# Altium PCB SmartCantonDevBox.PcbDoc (part 2 of 2)
Units mm, origin at the board's own origin, x right, y up, seen from the top; angles counter-clockwise.
Board outline 68 x 80 mm, 4 copper layers (Component Side, Ground Plane, Power Plane, Solder Side), stack 1.569 mm thick; 161 components, 90 nets, 543 pads, 213 vias.
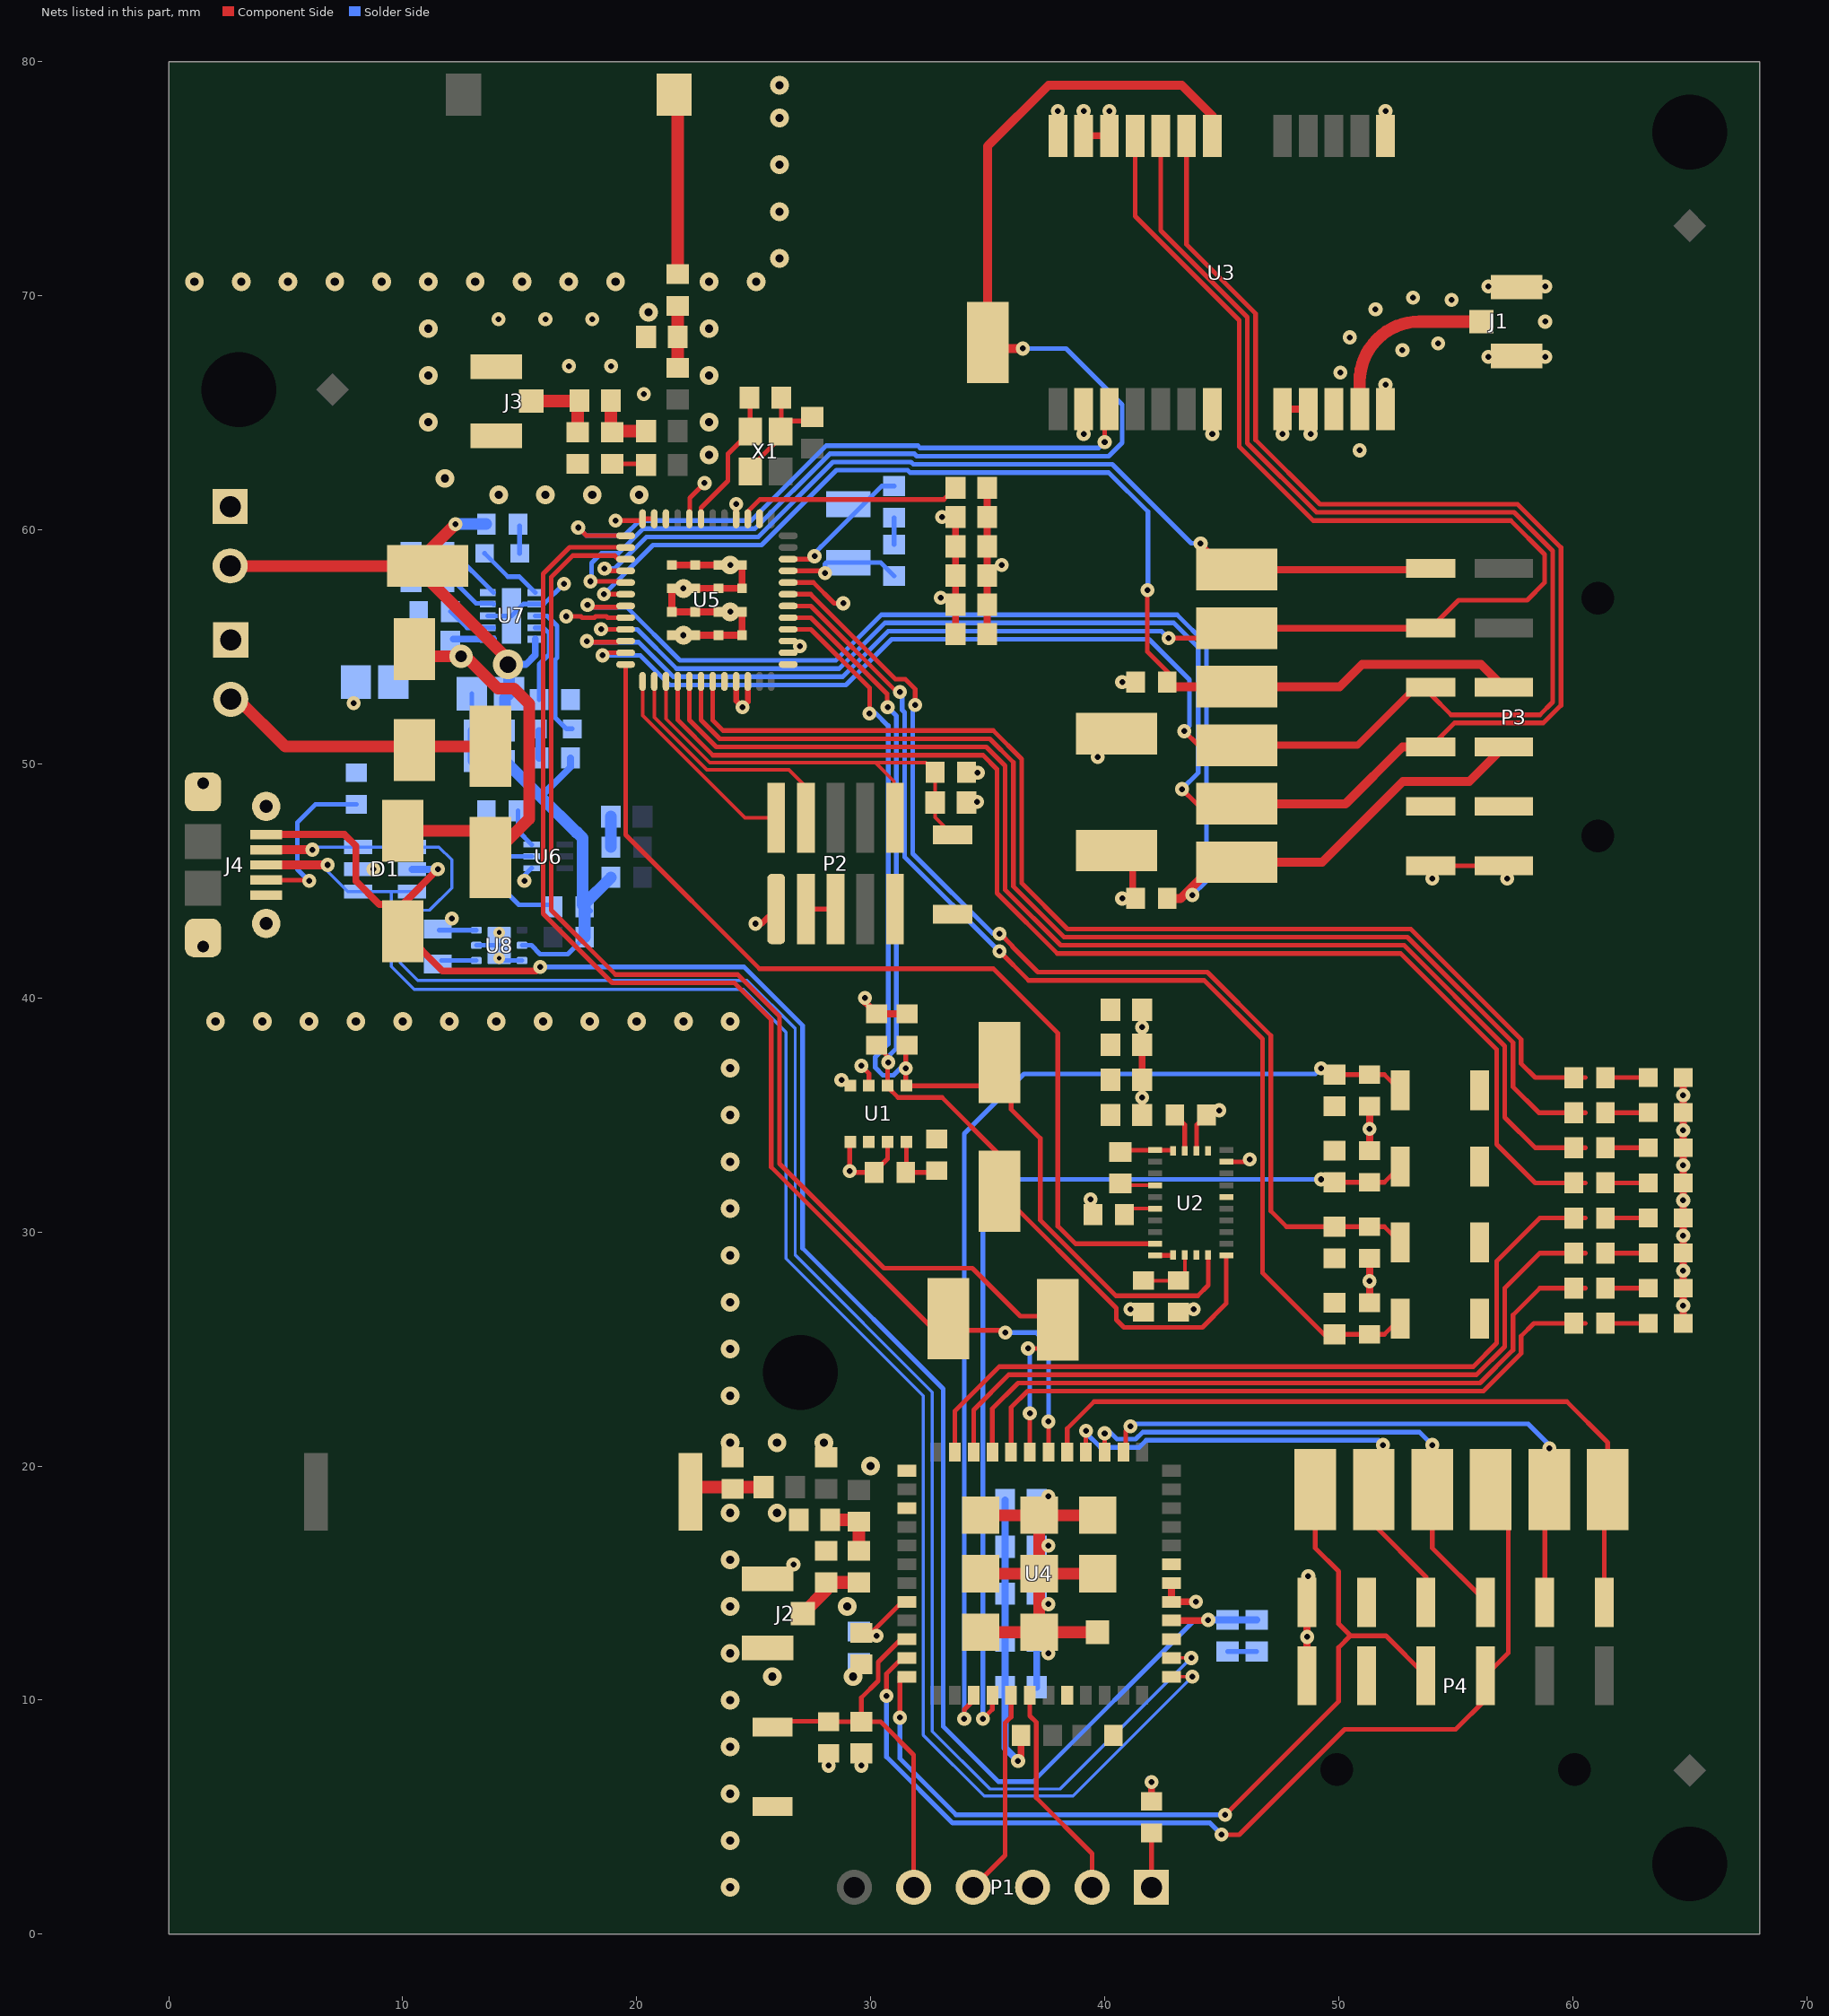
[diagram p4: the nets of this part, all layers, seen from the top]

## Via types
v1: diameter 0.6, hole 0.25, Component Side to Solder Side, tented both sides, 138 vias
v2: diameter 0.8, hole 0.35, Component Side to Solder Side, tented both sides, 67 vias
v3: diameter 0.8, hole 0.25, Component Side to Solder Side, tented both sides, 4 vias
v4: diameter 0.5, hole 0.2, Component Side to Solder Side, 2 vias
v5: diameter 1.27, hole 0.711, Component Side to Solder Side, tented both sides, 1 vias
v6: diameter 1, hole 0.5, Component Side to Solder Side, tented both sides, 1 vias

## Nets (pads, with @x,y where several pads share a name; then routed paths per layer and width w, separated by ;. In a path a pad name is that pad's centre, name@x,y a point inside that pad or via, vN(x,y) a via of type N, cw(c..) or ccw(c..) an arc to the next point about the centre after c; other vN are vias at no path point) (continued)
GND: B1.1 B2.1 B3.1 B4.1 B5.1 B6.1 C1.1 C2.1 C3.2 C4.2 C5.2 C6.2 C7.2 C8.1 C9.1 C10.1 C11.1 C12.1 C13.1 C14.1 C15.1 C16.1 C17.1 C18.1 C19.1 C20.1 C21.1 C24.1 C25.1 C26.1 C27.1 C28.1 C29.1 C30.1 C31.1 C32.1 C33.1 C34.1 C35.1 C36.1 C39.1 C40.1 C41.1 C42.1 C43.1 C44.2 C45.2 D1.2 J1.2 J1.3 J2.2 J2.3 J3.2 J3.3 J4.5 J4.S L2.1 L3.1 L5.1 L6.1 P1.3 P2.3 P2.5 P2.9 P3.9 P3.10 P4.9 P4.10 P5.1 P6.1 R5.1 R13.1 R21.2 R28.2 R30.1 R32.1 R36.1 R37.1 R38.1 TP14.1 U1.1 U1.7 U2.2 U2.5 U2.6 U2.15 U2.16 U2.18 U2.25 U3.2 U3.7 U3.10 U3.12 U3.13 U3.24 U4.3 U4.7 U4.25 U4.27 U4.44 U4.49 U4.50 U4.51 U4.52 U4.53 U4.54 U4.55 U4.56 U4.57 U5.8 U5.13 U5.26 U5.34 U5.49 U5.50 U5.51 U5.52 U5.53 U5.54 U5.55 U5.56 U5.57 U5.58 U5.59 U5.60 U5.61 U5.62 U5.63 U5.64 U6.4 U7.3 U7.7 U7.11 U8.2 U8.6 U8.7@14.125,42.25 X1.2 X1.4 | length 73.3
  Component Side w0.2: L5.1@18.95,62.825 20.35,62.825 C35.1@20.4,62.775 ; X1.4@24.85,62.5 24.85,62.654 26.15,63.954 X1.2@26.15,64.2 26.6,64.65 27.325,64.65 C31.1@27.5,64.825 ; X1.2@26.175,64.225 C30.1@26.175,65.65 ; P2.3@27.23,43.8 P2.5@28.5,43.8 ; C3.2@40.75,33.5 U2.6@42.15,33.5 42.9,33.5 U2.5@42.925,33.475 ; U2.15@42.15,29 U2.16@42.9,29
  Component Side w0.3: U5.49@21.5,55.5 U5.53@22.5,55.5 U5.57@23.5,55.5 U5.61@24.5,55.5 U5.62@24.5,56.5 U5.58@23.5,56.5 U5.54@22.5,56.5 U5.50@21.5,56.5 U5.51@21.5,57.5 U5.55@22.5,57.5 U5.59@23.5,57.5 U5.63@24.5,57.5 U5.64@24.5,58.5 U5.60@23.5,58.5 U5.56@22.5,58.5 U5.52@21.5,58.5 ; C29.1@34.975,55.55 C28.1@34.975,56.8 C27.1@34.975,58.05 C26.1@34.975,59.3 C25.1@34.975,60.55 C24.1@34.975,61.8
  Component Side w0.5: U4.51@34.7,12.9 U4.50@37.2,12.9 ; U4.54@34.7,15.4 U4.53@37.2,15.4 ; U4.57@34.7,17.9 U4.56@37.2,17.9 ; U4.49@39.7,12.9 U4.50@37.2,12.9 ; U4.52@39.7,15.4 U4.53@37.2,15.4 ; U4.55@39.7,17.9 U4.56@37.2,17.9 ; U4.50@37.2,12.9 U4.53@37.2,15.4 ; U4.53@37.2,15.4 U4.56@37.2,17.9
  Solder Side w0.2: C44.2@12.95,53 12.95,51.5 C42.1@13.025,51.425 ; U8.2@13.15,42.25 U8.7@14.125,42.25 ; U7.3@13.634,56.325 U7.11@14.65,56.325 15.158,56.833 U7.7@15.666,56.833 16.033,56.833 v1(16.9,57.7) ; v4(14.125,41.7) 14.225,41.6 U8.6@15.1,41.6 ; v1(15.2,45) 15.2,45.235 U6.4@15.515,45.55 ; C33.1@31,59.375 C34.1@31,60.525 ; C14.1@45.25,12.075 C13.1@46.5,12.075
  Solder Side w0.3: C18.1@37.095,10.55 C19.1@37.095,12.55 C17.1@37.095,14.55 C16.1@37.095,16.55 C15.1@37.095,18.55
  Solder Side w0.5: C43.1@13.025,50.125 C42.1@13.025,51.425 ; R32.1@18.9,46.45 C40.1@18.9,47.75
  other v1: 29.6,7.2 37.6,12 37.6,14.1 26.7,15.8 37.6,16.6 37.6,18.7 41.1,26.7 28.75,36.5 8.75,45.5 34.55,48.375 39.7,50.3 35.6,58.5 50.9,63.4 39.1,64.1 44.6,64.1 20.3,65.8 52,66.2 50.075,66.725 17.1,67 18.9,67 56.4,67.4 58.825,67.4 52.725,67.675 54.25,67.975 50.475,68.225 58.825,68.9 14.1,69 16.1,69 18.1,69 51.575,69.425 54.825,69.825 53.175,69.925 56.4,70.4 58.825,70.4 38,77.9 52,77.9
  other v2: 24,2 24,4 24,6 24,8 24,10 25.8,11 29.25,11 24,12 24,14 29,14 24,16 24,18 26,18 30,20 24,21 26,21 28,21 24,23 24,25 24,27 24,29 24,31 24,33 24,35 24,37 2,39 4,39 6,39 8,39 10,39 12,39 14,39 16,39 18,39 20,39 22,39 24,39 14.1,61.5 16.1,61.5 18.1,61.5 20.1,61.5 11.8,62.2 23.1,63.2 11.1,64.6 23.1,64.6 11.1,66.6 23.1,66.6 11.1,68.6 23.1,68.6 20.5,69.3 1.1,70.6 3.1,70.6 5.1,70.6 7.1,70.6 9.1,70.6 11.1,70.6 13.1,70.6 15.1,70.6 17.1,70.6 19.1,70.6 23.1,70.6 25.1,70.6 26.1,71.6 26.1,73.6 26.1,75.6 26.1,77.6 26.1,79
  other v3: 22,55.5 24,56.5 22,57.5 24,58.5
  other v4: 14.125,42.8
GPS_nCS: TP2.1 U3.18 U5.41 | length 56.2
  Component Side w0.2: v1(18.025,57.8) 19.175,57.8 19.225,57.75 U5.41@19.525,57.75
  Component Side w0.381: v1(36.5,67.75) 35.25,67.75 TP2.1@35,68 35,76.4 37.6,79 43.3,79 44.6,77.7 U3.18@44.6,76.842
  Solder Side w0.2: v1(18.025,57.8) 18.076,57.851 18.076,58.581 18.495,59 19.223,59 20.273,60.05 25.045,60.05 28.245,63.25 31.868,63.25 31.968,63.15 40.178,63.15 40.75,63.722 40.75,65.35 38.35,67.75 v1(36.5,67.75)
I2C0_SCL: R24.1 TP9.1 U1.4 U2.19 U5.16 | length 45.7
  Component Side w0.2: U5.16@26.475,55.75 27.45,55.75 29.951,53.249 v1(29.951,52.153) ; R24.1@31.525,37.95 31.5,37.925 v1(31.5,37) 31.5,36.275 U1.4@31.525,36.25 35.85,36.25 36,36.4 36,35.25 37.25,34 37.25,30.5 40.475,27.275 43.975,27.275 44.425,27.725 U2.19@44.425,29.025
  Solder Side w0.2: v1(29.951,52.153) 30.22,52.153 30.722,51.65 30.75,51.65 30.75,38.028 30.2,37.478 30.2,37.022 30.522,36.7 30.978,36.7 31.278,37 v1(31.5,37)
I2C0_SDA: R23.1 TP8.1 U1.3 U2.20 U5.17 | length 44.5
  Component Side w0.2: U5.17@26.475,56.25 27.445,56.25 30.7,52.995 30.7,52.45 v1(30.725,52.425) ; R23.1@30.25,37.975 30.75,37.475 v1(30.75,37.25) ; v1@30.725,36.975 U1.3@30.725,36.25 30.725,36.196 31.171,35.75 33.05,35.75 TP8.1@35.5,33.3 ; TP8.1@35.2,31.821 35.429,31.821 40.5,26.75 40.5,26.25 40.825,25.925 44.175,25.925 45.2,26.95 U2.20@45.2,29
  Solder Side w0.2: v1(30.725,52.425) 31.1,52.05 31.1,37.855 30.75,37.505 v1(30.75,37.25)
I2C1_SCL: P3.6 R26.1 TP11.1 U5.42 | length 49.6
  Component Side w0.2: v1(18.6,57.25) U5.42@19.525,57.25 ; v1(41.825,57.425) 41.825,54.8 R26.1@42.9,53.725
  Component Side w0.381: R26.1@42.875,53.3 TP11.1@45.65,53.3 50.05,53.3 51,54.25 56.08,54.25 P3.6@57.06,53.27
  Solder Side w0.2: v1(18.6,57.25) 20.7,59.35 25.335,59.35 28.535,62.55 31.579,62.55 31.679,62.45 40.178,62.45 41.85,60.778 v1@41.85,57.45
I2C1_SDA: P3.8 R25.1 TP10.1 U5.43 | length 59
  Component Side w0.2: v1(17.9,56.8) 18,56.7 19.15,56.7 19.2,56.75 U5.43@19.525,56.75 ; 43.25,44.25 43.4,44.4 v1(43.75,44.4)
  Component Side w0.381: R25.1@42.675,44.25 43.25,44.25 44.8,45.8 TP10.1@45.65,45.8 49.3,45.8 52.75,49.25 55.58,49.25 P3.8@57.06,50.73
  Solder Side w0.2: v1(17.9,56.8) 18,56.7 19.575,56.7 21.85,54.425 28.51,54.425 30.025,55.94 30.46,56.375 43.095,56.375 44.35,55.12 44.35,45 v1(43.75,44.4)
INT_BNO055: U2.14 U5.48 | length 42
  Component Side w0.2: U5.48@19.525,54.25 19.525,46.975 25.25,41.25 35.25,41.25 38,38.5 38,30.25 38.75,29.5 U2.14@42.15,29.5
KW41Z_PMOD_MISO: P3.5 TP4.1 U3.20 U5.47 | length 84.4
  Component Side w0.2: v1(18.538,54.64) 18.648,54.75 U5.47@19.525,54.75 ; U3.20@42.4,76.842 42.4,72.795 46.1,69.095 46.1,63.705 49.055,60.75 57.5,60.75 59.15,59.1 59.15,52.65 58.6,52.1 54.805,52.1 53.93,52.975 P3.5@53.93,53.27 ; v1(43.4,51.4) 44,50.8 TP4.1@45.65,50.8
  Component Side w0.3: TP4.1@45.65,50.8 50.8,50.8 53.27,53.27 P3.5@53.93,53.27
  Solder Side w0.2: v1(18.538,54.64) 20.15,54.64 21.415,53.375 28.945,53.375 30.895,55.325 41.9,55.325 43.625,53.6 43.625,51.625 v1(43.4,51.4)
KW41Z_PMOD_MOSI: P3.3 TP5.1 U3.21 U5.46 | length 76.4
  Component Side w0.2: v1(17.875,55.25) 17.925,55.2 19.175,55.2 19.225,55.25 U5.46@19.525,55.25 ; U3.21@41.3,76.842 41.3,73.4 45.75,68.95 45.75,63.56 48.91,60.4 57.355,60.4 58.8,58.955 58.8,57.75 58.05,57 55.12,57 P3.3@53.93,55.81 ; v1(42.725,55.375) 45.225,55.375 TP5.1@45.65,55.8
  Component Side w0.3: TP5.1@45.65,55.8 P3.3@53.92,55.8
  Solder Side w0.2: v1(17.875,55.25) 17.922,55.203 20.082,55.203 21.56,53.725 28.8,53.725 30.75,55.675 42.425,55.675 v1(42.725,55.375)
KW41Z_PMOD_SCK: P3.7 TP3.1 U3.19 U5.45 | length 89
  Component Side w0.2: v1(18.476,55.753) 19.522,55.753 U5.45@19.525,55.75 ; v1(43.3,48.925) 43.925,48.3 TP3.1@45.65,48.3 ; U3.19@43.5,76.842 43.5,72.19 46.45,69.24 46.45,63.85 49.2,61.1 57.645,61.1 59.5,59.245 59.5,52.5 58.75,51.75 54.95,51.75 P3.7@53.93,50.73
  Component Side w0.381: TP3.1@45.65,48.3 50.3,48.3 52.73,50.73 P3.7@53.93,50.73
  Solder Side w0.2: v1(18.476,55.753) 20.027,55.753 21.705,54.075 28.655,54.075 30.375,55.795 30.605,56.025 42.95,56.025 44,54.975 44,49.625 v1(43.3,48.925)
KW41Z_PMOD_SSEL: P3.1 TP1.1 U5.40 | length 39.6
  Component Side w0.2: v1(18.626,58.353) 18.729,58.25 U5.40@19.525,58.25 ; v1(44.1,59.425) TP1.1@45.225,58.3
  Component Side w0.3: TP1.1@45.65,58.3 P3.1@53.88,58.3
  Solder Side w0.2: v1(18.626,58.353) 19.071,58.353 20.418,59.7 25.19,59.7 28.39,62.9 31.724,62.9 31.824,62.8 40.323,62.8 43.698,59.425 v1(44.1,59.425)
LoRa_PMOD_MISO: P4.5 TP21.1 U4.15 | length 22.9
  Component Side w0.2: U4.15@40,20.6 v1(40,21.4) ; v1(54,20.9) TP21.1@54,19 54,16.5 56.27,14.23 P4.5@56.27,14.17
  Solder Side w0.2: v1(40,21.4) v1@40.178,21.4 ; v1@40.228,21.45 40.528,21.15 41.328,21.15 41.628,21.45 53.45,21.45 v1(54,20.9)
LoRa_PMOD_MOSI: P4.3 TP22.1 U4.14 | length 26.9
  Component Side w0.2: U4.14@40.8,20.6 40.7,20.7 40.9,20.9 40.9,21.5 v1(41.1,21.7) ; P4.3@58.81,14.17 58.81,18.81 TP22.1@59,19 59,20.9 v1(59,20.75)
  Solder Side w0.2: v1(41.1,21.7) 41,21.8 58.1,21.8 59,20.9 v1(59,20.75)
LoRa_PMOD_SCK: P4.7 TP19.1 U4.16 | length 19.9
  Component Side w0.2: U4.16@39.2,20.6 v1(39.2,21.5) ; TP19.1@51.5,19 51.5,17.5 53.73,15.27 P4.7@53.73,14.17
  Solder Side w0.2: v1(39.2,21.5) 39.2,21.422 39.822,20.8 40.378,20.8 41.473,20.8 41.773,21.1 51.7,21.1 v1(51.9,20.9)
LoRa_PMOD_SCL: P4.6 TP20.1 U4.35 | length 43.8
  Component Side w0.2: v1(30.675,10.175) 30.675,11.129 31.346,11.8 U4.35@31.55,11.8 ; v1(45,4.25) 45.75,4.25 50.25,8.75 55,8.75 56.27,10.02 P4.6@56.27,11.04 57.25,12.02 57.25,18.25 TP20.1@56.5,19
  Solder Side w0.2: v1(30.675,10.175) 30.675,7.575 33.5,4.75 44.5,4.75 v1(45,4.25)
LoRa_PMOD_SDA: P4.8 TP18.1 U4.36 | length 39.4
  Component Side w0.2: v1(31.25,9.25) 31.25,11 U4.36@31.55,11 ; v1(45.15,5.1) 50,9.95 50,12.25 50.5,12.75 ; TP18.1@49,19 49,16.5 50,15.5 50,13.25 50.5,12.75 ; P4.8@53.73,11.04 52.02,12.75 50.5,12.75
  Solder Side w0.2: v1(31.25,9.25) 31.25,7.5 33.65,5.1 v1(45.15,5.1)
LoRa_PMOD_SSEL: P4.1 TP17.1 U4.17 | length 32.2
  Component Side w0.2: U4.17@38.4,20.6 38.4,21.6 39.55,22.75 59.75,22.75 61.5,21 TP17.1@61.5,19 61.35,18.85 P4.1@61.35,14.17
MCU_nRST: B5.2 C10.2 P1.5 R22.2 U4.34 | length 16.7
  Component Side w0.2: B5.2@25.8,9.1 R22.2@28.175,9.1 ; R22.2@28.2,9.075 C10.2@29.6,9.075 ; U4.34@31.55,12.6 31.3,12.6 30.325,11.625 30.325,10.825 29.6,10.1 C10.2@29.6,9.075 ; P1.5@31.84,2 31.84,7.66 30.425,9.075 C10.2@29.6,9.075
NetC3_1: C3.1 U2.9 | length 1.4
  Component Side w0.15: C3.1@40.75,32 U2.9@42.15,32
NetC21_2: C21.2 E1.1 L1.2 | length 3.2
  Component Side w0.53: E1.1@22.301,18.9 22.501,19.1 L1.2@25.425,19.1
NetC22_2: C22.2 C23.1 L2.2 | length 2.5
  Component Side w0.548: L2.2@28.275,17.7 29.425,17.7 C22.2@29.5,17.625 C23.1@29.5,16.375
NetC23_2: C23.2 J2.1 L3.2 | length 3.1
  Component Side w0.548: J2.1@27.1,13.7 28.1,14.7 L3.2@28.1,15.025 C23.2@29.5,15.025
NetC36_2: C36.2 C46.1 L4.2 | length 2.6
  Component Side w0.53: L4.2@21.75,66.925 C36.2@21.75,68.25 C46.1@21.75,69.575
NetC37_2: C37.2 C38.1 L5.2 | length 2.8
  Component Side w0.53: L5.2@18.9,64.225 C38.1@18.9,65.525 ; L5.2@18.95,64.175 19,64.225 C37.2@20.4,64.225
NetC38_2: C38.2 J3.1 L6.2 | length 3.4
  Component Side w0.53: J3.1@15.5,65.5 17.525,65.5 17.475,65.45 L6.2@17.475,64.175
NetC39_2: C39.2 R29.1 U6.5 | length 5.5
  Solder Side w0.2: U6.5@15.515,46.05 14.55,46.05 13.861,45.361 C39.2@13.584,45.361 14.961,43.984 R29.1@16.341,43.984
NetC41_2: C41.2 D2.K D3.K TP15.1 U7.1 | length 19.9
  Component Side w0.5: D3.K@10,47.15 13.75,47.15 TP15.1@13.75,46 15.4,47.65 15.4,52.575 14.76,53.215 14.071,53.215 12.677,54.609 v6@12.5,54.609 ; D2.K@10.5,54.9 11,54.4 11.2,54.6 v6(12.5,54.6) v6@12.5,54.609
  Solder Side w0.3: C41.2@12.157,55.334 U7.1@13.884,55.334
NetC46_2: C46.2 E2.1 | length 7.7
  Component Side w0.53: E2.1@21.6,78.6 21.75,78.45 C46.2@21.75,70.925
NetDS1_2: DS1.2 R1.2 | length 1.8
  Component Side w0.2: R1.2@61.4,36.6 DS1.2@63.225,36.6
NetDS2_2: DS2.2 R3.2 | length 1.8
  Component Side w0.2: R3.2@61.4,35.1 DS2.2@63.225,35.1
NetDS3_2: DS3.2 R4.2 | length 1.8
  Component Side w0.2: R4.2@61.4,33.6 DS3.2@63.225,33.6
NetDS4_2: DS4.2 R6.2 | length 1.8
  Component Side w0.2: R6.2@61.4,32.1 DS4.2@63.225,32.1
NetDS5_2: DS5.2 R7.2 | length 1.8
  Component Side w0.2: R7.2@61.4,30.6 DS5.2@63.225,30.6
NetDS6_2: DS6.2 R8.2 | length 1.8
  Component Side w0.2: R8.2@61.4,29.1 DS6.2@63.225,29.1
NetDS7_2: DS7.2 R9.2 | length 1.8
  Component Side w0.2: R9.2@61.4,27.6 DS7.2@63.225,27.6
NetDS8_2: DS8.2 R10.2 | length 1.8
  Component Side w0.2: R10.2@61.4,26.1 DS8.2@63.225,26.1
NetDS9_1: DS9.1 R33.2 | length 1.2
  Solder Side w0.3: R33.2@15.825,50.25 DS9.1@15.825,51.425
NetDS9_2: DS9.2 U7.8 | length 6
  Solder Side w0.2: U7.8@15.666,56.325 16.175,56.325 16.6,55.9 16.6,54.53 16.525,54.455 16.525,51.975 17,51.5 DS9.2@17.25,51.5
NetDS10_1: DS10.1 R34.2 | length 1.2
  Solder Side w0.2: DS10.1@15,59 R34.2@15,60.175
NetDS10_2: DS10.2 U7.6 | length 2.9
  Solder Side w0.2: DS10.2@13.5,59 14.5,58 14.982,58 U7.6@15.666,57.316
NetJ4_4: J4.4 R28.1 | length 7.4
  Component Side w0.2: J4.4@4.166,45.036 5.964,45.036 v1(6,45)
  Solder Side w0.2: v1(6,45) 5.5,45.5 5.5,47.5 6.275,48.275 R28.1@8.025,48.275
NetL7_1: L7.1 U8.1 | length 1.5
  Solder Side w0.2: L7.1@11.65,41.6 U8.1@13.15,41.6
NetP1_1: P1.1 R19.2 | length 2.3
  Component Side w0.2: P1.1@42,2 R19.2@42,4.325
NetR2_1: R2.1 R5.2 U1.5 | length 2.6
  Component Side w0.2: R2.1@31.5,32.55 32.75,32.55 R5.2@32.825,32.625 ; R2.1@31.525,32.575 U1.5@31.525,33.85
NetR11_1: R11.1 R13.2 U2.17 | length 2.7
  Component Side w0.15: R13.2@41.65,27.925 R11.1@43.15,27.925 R11.1@43.325,28.1 ; R11.1@43.425,28.1 U2.17@43.425,29.025
NetR12_2: R12.2 U2.11 | length 1
  Component Side w0.15: R12.2@41.1,31 U2.11@42.15,31
NetR18_2: R18.2 U2.4 | length 1.7
  Component Side w0.2: R18.2@43,35 43.425,34.575 U2.4@43.425,33.475
NetR30_2: R30.2 U6.6 | length 1.7
  Solder Side w0.2: R30.2@14.925,48 14.925,47.14 U6.6@15.515,46.55
NetR35_1: R35.1 R36.2 U7.5 | length 4.3
  Solder Side w0.2: R36.2@10.359,59.086 R35.1@11.759,59.086 12.114,59.086 U7.5@13.884,57.316
NetR35_2: R35.2 U7.4 | length 2.5
  Solder Side w0.2: R35.2@11.759,57.736 12.264,57.736 13.137,56.863 13.854,56.863 U7.4@13.884,56.833
NetR37_2: R37.2 U7.9 | length 3.7
  Solder Side w0.2: U7.9@15.666,55.817 16.02,55.817 16.25,55.587 16.25,54.675 15.825,54.25 R37.2@15.825,52.75
NetR38_2: R38.2 U7.2 | length 2.1
  Solder Side w0.2: R38.2@12.034,56.511 12.058,56.511 12.752,55.817 U7.2@13.884,55.817
PTA0_SWD_DIO: P2.2 U5.1 | length 9
  Component Side w0.15: U5.1@20.25,53.525 20.25,52.076 24.626,47.7 P2.2@25.96,47.7
PTA1_SWD_CLK: P2.4 U5.2 | length 10.6
  Component Side w0.15: U5.2@20.75,53.525 20.75,52 23,49.75 26.5,49.75 27.23,49.02 P2.4@27.23,47.7
PTA2/nRESET: B6.2 C32.2 P2.10 R27.2 U5.3 | length 19
  Component Side w0.15: U5.3@21.25,53.525 21.25,51.924 23.124,50.05 30.2,50.05 ; P2.10@31,48.365 31,49.25 30.2,50.05 ; B6.2@33.5,46.975 32.75,47.725 R27.2@32.75,49.65 32.35,50.05 30.2,50.05
PTB16/EXTAL_32K: C33.2 U5.21 X2.1 | length 5.2
  Component Side w0.2: U5.21@26.475,58.25 27.954,58.25 v1(28.051,58.153)
  Solder Side w0.2: v1(28.051,58.153) 28.051,58.549 28.103,58.6 X2.1@29.05,58.6 30.425,58.6 C33.2@31,58.025
PTB17/XTAL_32K: C34.2 U5.22 X2.2 | length 6.1
  Component Side w0.2: U5.22@26.475,58.75 27.475,58.75 v1(27.6,58.875)
  Solder Side w0.2: v1(27.6,58.875) 27.486,58.875 27.48,58.88 27.85,59.25 27.85,59.254 27.996,59.4 28,59.4 30.475,61.875 C34.2@31,61.875
RF_IN: J1.1 U3.11 | length 7.8
  Component Side w0.53: U3.11@50.9,65.158 50.9,66.348 cw(c53.44,66.348) 51.644,68.144 51.656,68.156 cw(c53.452,66.36) 53.452,68.9 J1.1@56.1,68.9
SOLAR_INPUT: D2.A P5.2 TP12.1 | length 11.9
  Component Side w0.5: P5.2@2.65,52.76 2.965,52.76 4.975,50.75 TP12.1@13.75,50.75
SWCLK: P1.2 U4.42 | length 9.3
  Component Side w0.2: U4.42@36.8,10.2 36.8,9.329 37.075,9.054 37.075,5.825 39.46,3.44 P1.2@39.46,2
SWDIO: P1.4 U4.41 | length 8.9
  Component Side w0.2: P1.4@34.38,2 35.75,3.37 35.75,9.029 36,9.279 U4.41@36,10.2
TIMEPULSE: U3.3 U5.37 | length 28
  Component Side w0.2: v1(17.5,60.1) 17.85,59.75 U5.37@19.525,59.75 ; v1(40,63.75) 40,64.958 U3.3@40.2,65.158
  Solder Side w0.2: v1(17.5,60.1) 17.85,59.75 19.478,59.75 20.128,60.4 24.9,60.4 28.1,63.6 32.013,63.6 32.113,63.5 39.75,63.5 v1(40,63.75)
UART0_RX: TP7.1 U4.18 U5.38 | length 56.7
  Component Side w0.2: U5.38@19.525,59.25 19.522,59.253 17.128,59.253 16,58.125 16,43.6 18.95,40.65 24.175,40.65 25.75,39.075 25.75,32.775 32.825,25.7 33.325,25.7 TP7.1@33.325,26.3 ; TP7.1@33.475,25.8 35.85,25.8 v1(35.75,25.7) ; U4.18@37.6,20.6 v1(37.6,21.9)
  Solder Side w0.2: v1(35.75,25.7) 37.075,25.7 37.6,25.175 v1(37.6,21.9)
UART0_TX: TP6.1 U4.19 U5.39 | length 56.4
  Component Side w0.2: U5.39@19.525,58.75 19.208,58.75 19.056,58.903 17.273,58.903 16.35,57.98 16.35,43.745 19.095,41 24.32,41 26.1,39.22 26.1,32.92 30.57,28.45 34.35,28.45 36.4,26.4 TP6.1@37.85,26.4 ; v1(36.725,25.025) 37.2,25.025 37.775,25.6 TP6.1@37.55,25.825 ; U4.19@36.8,20.6 v1(36.8,22.25)
  Solder Side w0.2: v1(36.725,25.025) 36.8,25.1 v1(36.8,22.25)
USB_5V: C13.2 C14.2 D1.5 D3.A J4.1 U4.4 | length 82.5
  Component Side w0.3: J4.1@4.166,46.986 7.514,46.986 8,46.5 8,45 9,44 D3.A@10,44 ; v1(11.5,45.5) D3.A@10,44 ; v1(15.876,41.327) 15.699,41.15 11.7,41.15 D3.A@10,42.85 D3.A@10,44 ; U4.4@42.85,13.4 44.4,13.4 v1(44.425,13.425)
  Solder Side w0.2: v1(15.876,41.327) 24.591,41.327 27.091,38.827 27.091,29.309 33.1,23.3 33.1,8.875 35.459,6.516 36.941,6.516 43.85,13.425 v1(44.425,13.425)
  Solder Side w0.3: D1.5@10.4,45.5 v1(11.5,45.5) ; v1(44.425,13.425) C14.2@45.25,13.425 C13.2@46.5,13.425
USB_D_N: D1.3 D1.4 J4.2 U4.2 | length 79.7
  Component Side w0.132: U4.2@42.85,11.8 v1(43.7,11.8)
  Component Side w0.381: J4.2@4.166,46.336 v1(6.136,46.336)
  Solder Side w0.132: v1(6.136,46.336) 6.25,46.45 D1.3@8.1,46.45 D1.4@10.4,46.45 11.55,46.45 12.1,45.9 12.1,44.7 11.15,43.75 10.5,43.75 9.9,43.15 9.9,41.5 10.65,40.75 24.721,40.75 26.775,38.696 26.775,29.021 32.636,23.16 32.636,8.66 35.096,6.2 38.1,6.2 v1(43.7,11.8)
USB_D_P: D1.1 D1.6 J4.3 U4.1 | length 77.6
  Component Side w0.132: U4.1@42.85,11 v1(43.75,11)
  Component Side w0.381: J4.3@4.166,45.686 v1(6.786,45.686)
  Solder Side w0.132: v1(6.786,45.686) 6.786,45.414 7.65,44.55 D1.1@8.1,44.55 ; D1.6@10.4,44.55 D1.1@8.1,44.55 ; v1(43.75,11) 38.65,5.9 34.85,5.9 32.25,8.5 32.25,23 26.389,28.861 26.389,38.536 24.561,40.364 10.49,40.364 9.514,41.34 9.514,44.55 D1.1@8.1,44.55
USR_BTN0: B1.2 C4.1 R14.1 U5.18 | length 49.2
  Component Side w0.2: U5.18@26.475,56.75 27.44,56.75 31.115,53.075 v1(31.25,53.075) ; v1(35.5,42) 36.75,40.75 44.25,40.75 46.75,38.25 46.75,28.25 49.375,25.625 C4.1@49.825,25.625 R14.1@51.325,25.625 51.95,25.625 B1.2@52.625,26.3
  Solder Side w0.2: v1(31.25,53.075) 31.35,52.975 31.35,52.297 31.45,52.197 31.45,46.022 35.472,42 v1(35.5,42)
USR_BTN1: B2.2 C5.1 R15.1 U5.19 | length 46.2
  Component Side w0.2: U5.19@26.475,57.25 27.435,57.25 31.06,53.625 31.478,53.625 31.9,53.203 v1(31.9,52.525) ; v1(35.5,42.75) 35.528,42.75 36.05,42.228 36.05,42.2 37.15,41.1 44.395,41.1 47.1,38.395 47.1,30.9 47.775,30.225 C5.1@49.825,30.225 R15.1@51.325,30.225 51.95,30.225 B2.2@52.625,29.55
  Solder Side w0.2: v1@31.8,52.425 31.8,46.167 35.217,42.75 v1(35.5,42.75)
USR_BTN2: B3.2 C6.1 R16.1 U4.40 | length 42.1
  Component Side w0.2: v1(34.8,9.2) 35.2,9.6 U4.40@35.2,10.2 ; v1(49.25,32.25) 49.125,32.125 C6.1@49.825,32.125 R16.1@51.325,32.125 51.95,32.125 B3.2@52.625,32.8
  Solder Side w0.2: v1(34.8,9.2) 34.8,31.3 35.75,32.25 v1(49.25,32.25)
USR_BTN3: B4.2 C7.1 R17.1 U4.39 | length 46.4
  Component Side w0.2: v1(34,9.2) 34,9.596 34.4,9.996 U4.39@34.4,10.2 ; v1(49.25,37) 49.5,37 49.8,36.7 C7.1@49.825,36.725 R17.1@51.325,36.725 51.95,36.725 B4.2@52.625,36.05
  Solder Side w0.2: v1(34,9.2) 34,34.2 36.55,36.75 49,36.75 v1(49.25,37)
USR_LED0: R1.1 U5.7 | length 49
  Component Side w0.2: U5.7@23.25,53.525 23.25,51.869 23.694,51.425 35.235,51.425 36.45,50.21 36.45,44.91 38.41,42.95 53.085,42.95 57.8,38.235 57.8,37.2 58.4,36.6 60.55,36.6
USR_LED1: R3.1 U5.6 | length 50.6
  Component Side w0.2: U5.6@22.75,53.525 22.75,51.874 23.549,51.075 35.09,51.075 36.1,50.065 36.1,44.765 38.265,42.6 52.94,42.6 57.45,38.09 57.45,36.204 58.554,35.1 60.55,35.1
USR_LED2: R4.1 U5.5 | length 52.4
  Component Side w0.2: U5.5@22.25,53.525 22.25,51.879 23.404,50.725 34.945,50.725 35.75,49.92 35.75,44.62 38.12,42.25 52.795,42.25 57.1,37.945 57.1,34.9 58.4,33.6 60.55,33.6
USR_LED3: R6.1 U5.4 | length 54.1
  Component Side w0.2: U5.4@21.75,53.525 21.75,51.884 23.259,50.375 34.8,50.375 35.4,49.775 35.4,44.475 37.975,41.9 52.65,41.9 56.75,37.8 56.75,33.75 58.4,32.1 60.55,32.1
USR_LED4: R7.1 U4.23 | length 34.2
  Component Side w0.2: U4.23@33.6,20.6 33.6,22.35 35.5,24.25 55.75,24.25 56.75,25.25 56.75,28.75 58.6,30.6 60.55,30.6
USR_LED5: R8.1 U4.22 | length 32.2
  Component Side w0.2: U4.22@34.4,20.6 34.4,22.4 35.9,23.9 55.895,23.9 57.1,25.105 57.1,27.6 58.6,29.1 60.55,29.1
USR_LED6: R9.1 U4.21 | length 30.2
  Component Side w0.2: U4.21@35.2,20.6 35.2,22.45 36.3,23.55 56.04,23.55 57.45,24.96 57.45,26.45 58.6,27.6 60.55,27.6
USR_LED7: R10.1 U4.20 | length 28.4
  Component Side w0.2: U4.20@36,20.6 36,22.5 36.7,23.2 56.185,23.2 57.8,24.815 57.8,25.55 58.35,26.1 60.55,26.1
VBAT: C42.2 C43.2 C44.1 P6.2 R29.2 R31.2 R33.1 R34.1 R39.2 TP13.1 U7.10 U8.5 | length 40.1
  Component Side w0.5: P6.2@2.625,58.46 TP13.1@11.065,58.46 ; v1(12.25,60.25) 11.065,59.065 11.065,57.91 14.5,54.475 v5(14.5,54.25)
  Solder Side w0.2: U8.5@15.1,42.25 15.501,42.25 15.874,41.877 17.052,41.877 R39.2@17.775,42.6 ; R29.2@17.9,43.85 R29.2@18.025,43.725
  Solder Side w0.3: v5(14.5,54.25) 15.259,54.25 15.666,54.657 U7.10@15.666,55.334 ; 15.9,48.6 17.175,49.875 R33.1@17.175,50.25
  Solder Side w0.5: v1(12.25,60.25) R34.1@13.575,60.25 ; v5(14.5,54.25) 14.55,54.2 C44.1@14.55,53 14.375,52.825 C42.2@14.375,51.425 C43.2@14.375,50.125 15.9,48.6 17.425,47.075 17.451,47.075 17.685,46.841 17.685,43.99 R29.2@17.775,43.9 ; R39.2@17.775,42.6 R29.2@17.775,43.9 ; R31.2@18.9,45.15 17.775,44.025 R29.2@17.775,43.9
VCC_3.3: C1.2 C2.2 C8.2 C9.2 C15.2 C16.2 C17.2 C18.2 C19.2 C25.2 C26.2 C27.2 C28.2 C29.2 C45.1 DS1.1 DS2.1 DS3.1 DS4.1 DS5.1 DS6.1 DS7.1 DS8.1 L7.2 P2.1 P3.11 P3.12 P4.11 P4.12 R2.2 R11.2 R12.1 R14.2 R15.2 R16.2 R17.2 R18.1 R19.1 R20.2 R22.1 R23.2 R24.2 R25.2 R26.2 R27.1 TP16.1 U1.2 U1.6 U1.8 U2.3 U2.28 U3.8 U3.9 U3.22 U3.23 U4.5 U4.6 U5.9 U5.10 U5.14 U5.15 U5.20 U5.28 U5.32 U5.35 U5.36 U5.44 U8.3 | length 76.6
  Component Side w0.2: v1(16.995,56.305) 17.601,56.305 17.599,56.303 17.619,56.303 17.672,56.25 18.128,56.25 18.195,56.25 18.248,56.303 18.704,56.303 18.756,56.25 U5.44@19.525,56.25 ; v1(19.1,60.4) 20.175,60.4 U5.36@20.25,60.475 U5.35@20.75,60.475 ; U5.32@22.25,60.475 22.265,60.49 22.265,61.365 v1(22.9,62) ; U5.20@26.475,57.75 27.55,57.75 28.437,56.863 v1(28.827,56.863) ; U1.8@29.125,33.85 29.1,33.825 v1(29.1,32.6) 29.15,32.55 R2.2@30.15,32.55 30.725,33.125 U1.6@30.725,33.85 ; v1(29.6,37.1) 29.925,36.775 U1.2@29.925,36.25 ; v1(39.4,31.4) 39.4,30.85 R12.1@39.5,30.75 ; U2.3@43.925,33.475 43.925,34.575 R18.1@44.35,35 ; U2.28@45.2,33 v1@46.1,33 ; P3.11@53.93,45.65 P3.12@57.06,45.65
  Component Side w0.25: U5.9@24.25,53.525 24.25,52.7 v1(24.525,52.425) 24.75,52.65 U5.10@24.75,53.525 ; U5.28@24.25,60.475 v1(24.25,61.1) ; v1(25.076,43.176) 25.336,43.176 P2.1@25.96,43.8
  Component Side w0.3: v1(29.75,40) 29.75,39.825 R23.2@30.25,39.325 R24.2@31.55,39.325 ; v1(33,57.1) 33.325,57.1 C28.2@33.625,56.8 ; v1(33.05,60.55) C25.2@33.625,60.55 C26.2@33.625,59.3 C27.2@33.625,58.05 C28.2@33.625,56.8 ; C29.2@33.625,55.55 C28.2@33.625,56.8 ; v1(36.3,7.4) 36.425,7.525 R20.2@36.425,8.5 ; U3.23@39.1,76.842 U3.22@40.2,76.842 ; TP16.1@40.5,46.3 41.2,45.6 41.2,44.25 v1(40.75,44.25) ; C9.2@41.6,35 C8.2@41.6,36.5 C2.2@41.6,38 C1.2@41.6,39.5 ; R19.1@42,5.675 v1(42,6.5) ; U4.6@42.85,15 U4.5@42.85,14.2 v1(43.9,14.2) ; U3.8@47.6,65.158 U3.9@48.7,65.158 ; P4.12@48.65,11.04 P4.11@48.65,14.17 ; R14.2@51.325,26.975 R15.2@51.325,28.875 ; R16.2@51.325,33.475 R17.2@51.325,35.375 ; DS8.1@64.725,26.1 DS7.1@64.725,27.6 DS6.1@64.725,29.1 DS5.1@64.725,30.6 DS4.1@64.725,32.1 DS3.1@64.725,33.6 DS2.1@64.725,35.1 DS1.1@64.725,36.6
  Solder Side w0.2: L7.2@11.55,42.9 U8.3@13.15,42.9
  Solder Side w0.3: C15.2@35.745,18.55 C16.2@35.745,16.55 C17.2@35.745,14.55 C19.2@35.745,12.55 C18.2@35.745,10.55 35.745,7.955 v1(36.3,7.4) ; v1@41.9,6.6 v1(42,6.5)
  other v1: 28.2,7.2 48.65,12.7 48.7,15.3 43.8,26.7 64.725,26.85 51.325,27.9 64.725,28.35 64.725,29.85 64.725,31.35 64.725,32.85 46.2,33.1 64.725,34.35 51.325,34.4 44.9,35.2 41.6,35.75 64.725,35.85 41.6,38.75 12.1,43.4 54,45.1 57.2,45.1 34.575,49.625 7.9,52.6 40.75,53.5 26.975,55.025 47.6,64.1 48.8,64.1 39.1,77.9 40.2,77.9
VREF: C24.2 U5.27 | length 9.6
  Component Side w0.2: U5.27@24.75,60.475 24.75,60.792 25.258,61.3 33.125,61.3 C24.2@33.625,61.8
VREF+: C11.2 C12.2 U4.32 | length 2.5
  Component Side w0.2: C12.2@29.6,12.875 30.021,12.875 31.346,14.2 U4.32@31.55,14.2
  other v1: 30.25,12.75
XTAL: C30.2 U5.31 X1.3 | length 6
  Component Side w0.2: U5.31@22.75,60.475 22.75,60.945 23.9,62.095 23.9,63.2 ; 23.9,63.25 X1.3@24.85,64.2 C30.2@24.85,65.625
pads on no net: E1.2 E2.2 J4. M1.1 M2.1 M3.1 M4.1 M5.1 M6.1 P1.6 P2.6 P2.7 P2.8 P3.0 P3.2 P3.4 P4.0 P4.2 P4.4 U2.1 U2.7 U2.8 U2.10 U2.12 U2.13 U2.21 U2.22 U2.23 U2.24 U2.26 U2.27 U3.1 U3.4 U3.5 U3.6 U3.14 U3.15 U3.16 U3.17 U4.8 U4.9 U4.10 U4.11 U4.12 U4.13 U4.24 U4.28 U4.29 U4.30 U4.31 U4.33 U4.37 U4.38 U4.45 U4.46 U4.47 U4.48 U5.11 U5.12 U5.24 U5.25 U5.29 U6.1 U6.2 U8.7@14.125,41.8 U8.7@14.125,42.7
copper on no net: | length 44
  Component Side w0.1: 56.5,77 56.5,79 ; 58,77 58,79 ; 59.5,77 59.5,79 ; 55,77 55,79 61,79 61,77 55,77
  Solder Side w0.1: 56.5,77 56.5,79 ; 58,77 58,79 ; 59.5,77 59.5,79 ; 55,77 55,79 61,79 61,77 55,77

## Polygon pours and split planes (outlines as drawn)
GND on Component Side "Bottom Layer-No Net" (solid, remove dead copper, pour order 0): 0,80 68,80 68,0 0,0
GND on Solder Side "Bottom Layer-No Net" (solid, remove dead copper, pour order 2): 0,80 68,80 68,0 0,0
GND on Ground Plane (split plane): 59.449,77.051 58.051,77.051 58.051,78.949 59.449,78.949
GND on Ground Plane (split plane): 57.949,77.051 56.551,77.051 56.551,78.949 57.949,78.949
GND on Ground Plane (split plane): 60.949,77.051 59.551,77.051 59.551,78.949 60.949,78.949
GND on Ground Plane (split plane): 56.449,77.051 55.051,77.051 55.051,78.949 56.449,78.949
GND on Ground Plane (split plane): 67.49,0.51 23.5,0.51 23.5,38.5 0.51,38.5 0.51,71.5 25.5,71.5 25.5,79.49 67.49,79.49
VCC_3.3 on Power Plane (split plane): 59.449,77.051 58.051,77.051 58.051,78.949 59.449,78.949
VCC_3.3 on Power Plane (split plane): 57.949,77.051 56.551,77.051 56.551,78.949 57.949,78.949
VCC_3.3 on Power Plane (split plane): 60.949,77.051 59.551,77.051 59.551,78.949 60.949,78.949
VCC_3.3 on Power Plane (split plane): 56.449,77.051 55.051,77.051 55.051,78.949 56.449,78.949
VCC_3.3 on Power Plane (split plane): 67.49,0.51 23.5,0.51 23.5,38.5 0.51,38.5 0.51,71.5 25.5,71.5 25.5,79.49 67.49,79.49

## Keep-outs
Component Side:
  lines w0.1: 5,64 5,68 9,68 9,64 5,64 ; 63,5 67,5 67,9 63,9 63,5 ; 63,71 67,71 67,75 63,75 63,71
Solder Side:
  lines w0.1: 5,64 5,68 9,68 9,64 5,64 ; 63,5 63,9 67,9 67,5 63,5 ; 63,71 67,71 67,75 63,75 63,71
Keep-Out Layer:
  rectangle: 0,71.5 25.5,80
  region: 23.5,0 23.5,38.5 0,38.5 0,0
  lines w0.1: 0,0 0,80 68,80 68,0 0,0
  lines w1: 50.9,64.5 50.9,66.262 ; 50.941,66.262 cw(c53.696,66.262) 54,69 56.1,69

## Other copper
Component Side:
  region net ANT_MKW41Z: 21.5,61.225 21.625,60.675 21.875,60.675 21.925,60.875 22,61.225
  text "1" at 55.5,77.5 h1
Solder Side:
  text "4" at 60.5,77.5 h1
Ground Plane (plane layer: these items are gaps in the copper):
  rectangle: 0.5,0.5 23.5,38.5
  rectangle: 0.5,71.5 25.5,80
  lines w0.1: 56.5,77 56.5,79 ; 58,77 58,79 ; 59.5,77 59.5,79 ; 55,77 61,77 61,79 55,79 55,77
  lines w1: 50.9,64.5 50.9,66 cw(c53.7,66.2) 53.5,69 56.1,69
  text "2" at 57,77.5 h1
Power Plane (plane layer: these items are gaps in the copper):
  rectangle: 0.5,0.5 23.5,38.5
  rectangle: 0.5,71.5 25.5,80
  lines w0.1: 56.5,77 56.5,79 ; 58,77 58,79 ; 59.5,77 59.5,79 ; 55,77 55,79 61,79 61,77 55,77
  lines w1: 50.9,64.5 50.9,66 cw(c53.7,66.2) 53.5,69 56.1,69
  text "3" at 58.5,77.5 h1

## Silkscreen, mask and mechanical layers (free items; w line width, h text height)
Top Overlay:
  text "GPS" at 33.5,76.75 h1
  text "2.45 GHz antenna" at 4.25,74.25 h1
  text "GPS_nCS" at 30.75,70.5 h0.8
  text "GPS antenna" at 55.75,64.75 h1
  text "GND" at 4.25,60.5 h0.8
  text "SSEL" at 48,58.3 h0.8
  text "BAT" at 4.25,58 h0.8
  text "MOSI" at 48,55.75 h0.8
  text "GND" at 4.25,55 h0.8
  text "SCL" at 48,53.25 h0.8
  text "SOLAR" at 4.25,52.5 h0.8
  text "GND" at 36,50.75 h0.8
  text "MISO" at 48,50.75 h0.8
  text "SOLAR" at 15.4,50.4 h0.8
  text "SCK" at 48,48.25 h0.8
  text "VCC_3.3" at 36.5,47.75 h0.8
  text "USB_5V" at 15.25,46.75 h0.8
  text "SDA" at 48,45.75 h0.8
  text "RST" at 35.25,44 h0.8
  text "SCL" at 34.5,39.5 h0.8
  text "SmartCanton DevBox" at 1.5,36.25 h1
  text "V1.0" at 1.5,34.5 h1
  text "SDA" at 34.5,34 h0.8
  text "HES-SO Master \ hepia" at 1.5,32.75 h1
  text "Andrade David" at 1.5,31 h1
  text "RX" at 30.5,26.25 h0.8
  text "TX" at 35.25,26.25 h0.8
  text "SDA" at 49.25,21.25 h0.8 r90
  text "SCK" at 51.75,21.25 h0.8 r90
  text "MISO" at 54.25,21.25 h0.8 r90
  text "SCL" at 56.75,21.25 h0.8 r90
  text "MOSI" at 59.25,21.25 h0.8 r90
  text "SSEL" at 61.75,21.25 h0.8 r90
  text "LoRa 868MHz" at 6,14.7 h1
  text "RST" at 24.75,3.75 h0.8
Mechanical 2:
  the board outline again, w0.5
Mechanical 15:
  lines w0.1: 0,38 23,38 23,0

## Text inside footprints (layer, text, board x,y; h text height)
J4: Mechanical 13 "PCB END" at 0.025,45.2 h0.5 r270